# EAGLE board PLL_Counter_plain (EAGLE 6.3)
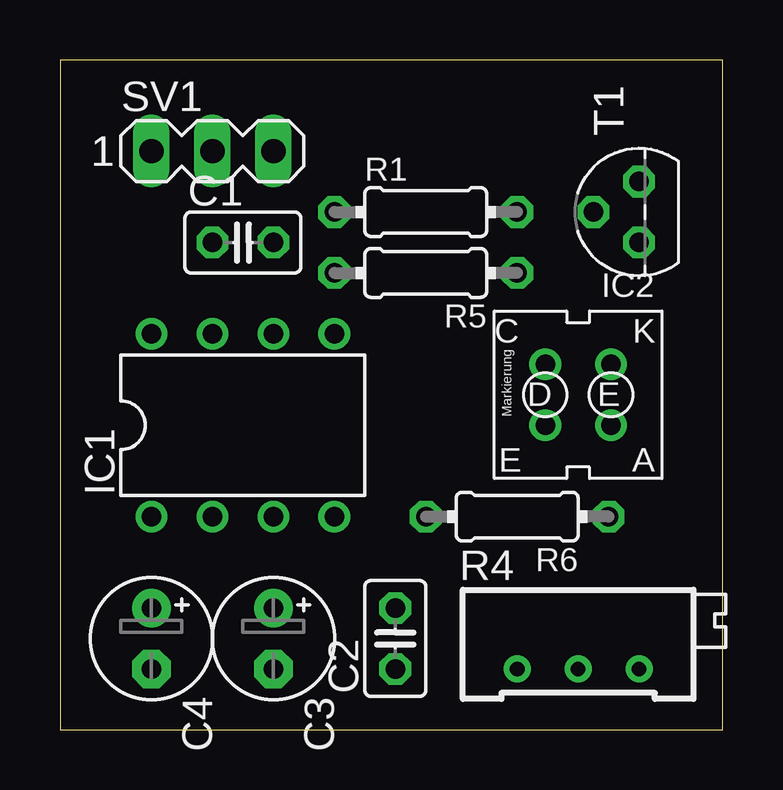
[diagram p0: board, top side]
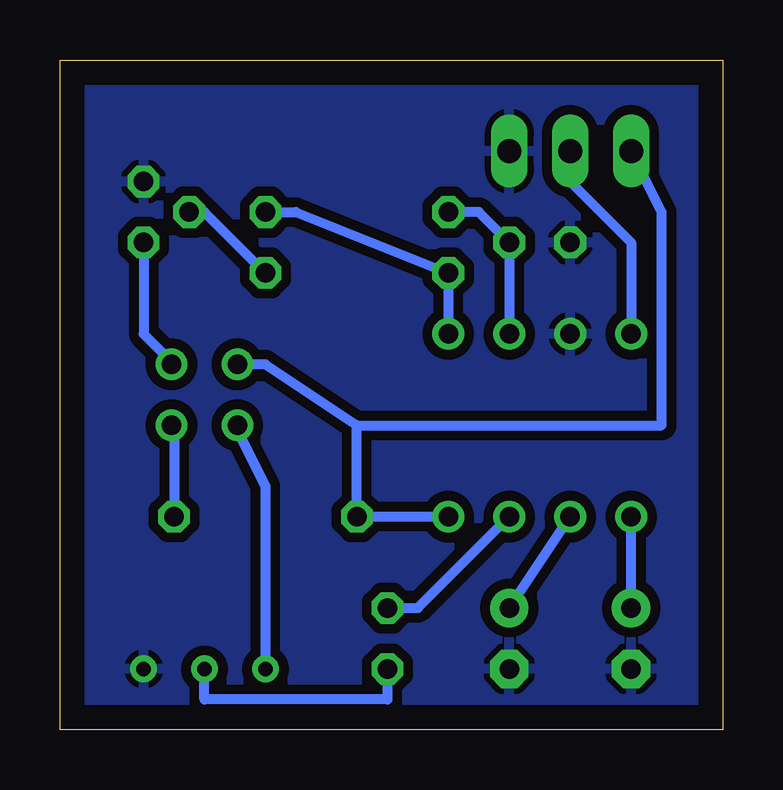
[diagram p1: board, bottom side, seen from below]

Size 27.61 x 27.93 mm. Coordinates in mm from the lower left corner, seen from the top.
Outline: 0,0 27.61,0 27.61,27.93 0,27.93 0,0
Copper layers (1*16): Top 0.035mm / dielectric 1.5mm / Bottom 0.035mm
Design rules "default *": minimum track width 16mil, minimum drill 24mil, track to track 16mil, track to pad 16mil, pad to pad 16mil, via to via 16mil, smd to smd 8mil, copper to edge 40mil, drill to drill 16mil, minimum pad ring 10mil, minimum via ring 8mil, stop-mask expansion 4mil, vias tented up to drill 0mil, thermal gap 10mil

## Footprints (pad centres in the part's own frame; a part is rotated, then mirrored left to right if it is on the bottom)
C025-025X050 = drill 0.813 octagon: 1 -1.27,0; 2 1.27,0
E2,5-5 = drill 0.813 pad 1.6: + -1.27,0 | drill 0.813 pad 1.6 octagon: - 1.27,0
DIL08 = drill 0.813 pad 1.27: 1 -3.81,-3.81; 2 -1.27,-3.81; 3 1.27,-3.81; 4 3.81,-3.81; 5 3.81,3.81; 6 1.27,3.81; 7 -1.27,3.81; 8 -3.81,3.81
CNY70 = drill 0.813: DC 1.37,-1.27; DE 1.37,1.27; EA -1.37,1.27; EK -1.37,-1.27
0204/7 = drill 0.813 octagon: 1 -3.81,0; 2 3.81,0
RTRIM64X = drill 0.61: 1 1.27,-2.54; 2 1.27,0; 3 1.27,2.54
MA03-1 = drill 1.016 long: 1 -2.54,0; 2 0,0; 3 2.54,0
TO92 = drill 0.813 octagon: 1 1.27,0; 2 0,1.905; 3 -1.27,0

## Placement (x,y rotation side)
C1  100nF  [C025-025X050]  7.62,20.32 0 top
C2  100nF  [C025-025X050]  13.97,3.81 90 top
C3  1uF  [E2,5-5]  8.89,3.81 270 top
C4  1uF  [E2,5-5]  3.81,3.81 270 top
IC1  NE567N  [DIL08]  7.62,12.7 0 top
IC2  CNY70  [CNY70]  21.59,13.97 180 top
R1  2k2  [0204/7]  15.24,21.59 0 top
R4  20k  [RTRIM64X]  21.59,3.81 270 top
R5  10k  [0204/7]  15.24,19.05 180 top
R6  470  [0204/7]  19.05,8.89 180 top
SV1  [MA03-1]  6.35,24.13 0 top
T1  BC547  [TO92]  24.13,21.59 90 top

## Library data of the parts
C1-C4 R1 R5 R6 = resistor
IC1 = linear
IC2 = CNY70
R4 = rcl
SV1 = con-lstb; OC_FARNELL: unknown; OC_NEWARK: unknown
T1 = transistor

## Nets
+5V: IC1.4 IC2.DC R6.2 SV1.1
GND: C1.1 C3.- C4.- IC1.7 R4.3 SV1.3 T1.1
N$1: IC2.EK T1.3
N$2: IC1.5 R1.2 R5.2
N$3: C1.2 IC1.6 R1.1
N$4: IC1.8 SV1.2
N$6: C2.2 IC1.3
N$7: IC2.DE R4.1
N$8: R5.1 T1.2
N$10: IC2.EA R6.1
N$11: C3.+ IC1.2
N$12: C4.+ IC1.1
N$14: C2.1 R4.2

## Tracks (layer width: path | path; a pad name or v marks a point on that pad's centre or on a via)
+5V
  Bottom 0.406: IC1.4 R6.2 15.24,12.7 | 15.24,12.7 19.05,15.24 IC2.DC 20.32,15.24 | SV1.1 2.54,21.59 2.54,12.7 15.24,12.7
GND
  pour Bottom: 0,27.94 27.94,27.94 27.94,0 0,0
N$1
  Bottom 0.406: T1.3 24.13,16.51 22.86,15.24 IC2.EK
N$2
  Bottom 0.406: IC1.5 R5.2 17.78,21.59 R1.2
N$3
  Bottom 0.406: IC1.6 C1.2 10.16,21.59 R1.1
N$4
  Bottom 0.406: IC1.8 3.81,20.32 6.35,22.86 SV1.2
N$6
  Bottom 0.406: IC1.3 12.7,5.08 C2.2
N$7
  Bottom 0.406: R4.1 19.05,10.16 20.32,12.7 IC2.DE
N$8
  Bottom 0.406: R5.1 21.59,21.59 T1.2
N$10
  Bottom 0.406: R6.1 22.86,12.7 IC2.EA
N$11
  Bottom 0.406: C3.+ IC1.2
N$12
  Bottom 0.406: C4.+ IC1.1
N$14
  Bottom 0.406: R4.2 21.59,1.27 13.97,1.27 C2.1